# EAGLE board Questão 1 (EAGLE 7.6.0)

Size 56.82 x 53.33 mm. Coordinates in mm from the lower left corner, seen from the top.
Outline: 0,0 56.82,0 56.82,53.33 0,53.33 0,0
Copper layers (1*16): Top 0.035mm / dielectric 1.5mm / Bottom 0.035mm
Design rules "default": minimum track width 10mil, minimum drill 24mil, track to track 8mil, track to pad 8mil, pad to pad 8mil, via to via 8mil, smd to smd 8mil, copper to edge 40mil, drill to drill 8mil, minimum pad ring 10mil, minimum via ring 8mil, stop-mask expansion 4mil, vias tented up to drill 0mil, thermal gap 10mil

## Footprints (pad centres in the part's own frame; a part is rotated, then mirrored left to right if it is on the bottom)
7-SEGMENT-CC = drill 0.813 long: 1 -3.81,7.62; 2 -3.81,5.12; 4 -3.81,0; 6 -3.81,-5.08; 7 -3.81,-7.62; 8 3.81,-7.62; 9 3.81,-5.08; 12 3.81,2.54; 13 3.81,5.08; 14 3.81,7.62
0207/10 = drill 0.813 octagon: 1 -5.08,0; 2 5.08,0
TL1105 = drill 1 pad 1.676: 1 -2.25,3.25; 2 2.25,3.25; 3 -2.25,-3.25; 4 2.25,-3.25

## Placement (x,y rotation side)
Digit1  [7-SEGMENT-CC]  5,10.08 0 top
R1  220‎Ω  [0207/10]  5,22.78 0 top
S1  [TL1105]  5,35.48 0 top
S2  [TL1105]  5,48.18 0 top

## Library data of the parts
Digit1 R1 S1 S2 = AUTODESK_CIRCUITS_BREADBOARD

## Nets
N$1: Digit1.4 R1.2
N$2: Digit1.14
N$3: R1.1
N$4: Digit1.13
N$5: Digit1.8
N$6: Digit1.7
N$7: Digit1.6
N$8: Digit1.1
N$9: Digit1.2
N$10: Digit1.9
N$11: S1.2 S2.2
N$13: S1.1
N$14: S1.3
N$15: S1.4
N$16: S2.1
N$17: S2.3
N$18: S2.4

## Tracks (layer width: path | path; a pad name or v marks a point on that pad's centre or on a via)
N$1  (1 unrouted)
N$11  (1 unrouted)